# EAGLE board PanelTemplate (EAGLE 7.7.0)

Size 100.01 x 100 mm. Coordinates in mm from the lower left corner, seen from the top.
Copper layers (1*16): Top 0.035mm / dielectric 1.5mm / Bottom 0.035mm
Design rules "default": minimum track width 10mil, minimum drill 0.6mm, track to track 8mil, track to pad 8mil, pad to pad 8mil, via to via 8mil, smd to smd 8mil, copper to edge 40mil, drill to drill 8mil, minimum pad ring 10mil, minimum via ring 8mil, stop-mask expansion 4mil, vias tented up to drill 0mil, thermal gap 10mil
Milling: 7 lines

## Placement (x,y rotation side)
U$1X1  [BOARD-SEEED10X10-NOHOLES]  0.01,0 0 top

## Library data of the parts
U$1X1 = SPCoast

## Text on the board
Milling: V-Score | V-Score | V-Score | V-Score | V-Score | V-Score | V-Score
tDocu: Adapter RJ45 to Signal Head | V3.1 | 2018-01